# Altium PCB Copy of PCB1.PcbDoc
Units mm, origin at the board's own origin, x right, y up, seen from the top; angles counter-clockwise.
Board outline 152.4 x 101.6 mm, 2 copper layers (Top Layer, Bottom Layer); 12 components, 9 nets, 96 pads, 0 vias.
Unrouted connection lines stored in the file: 21.
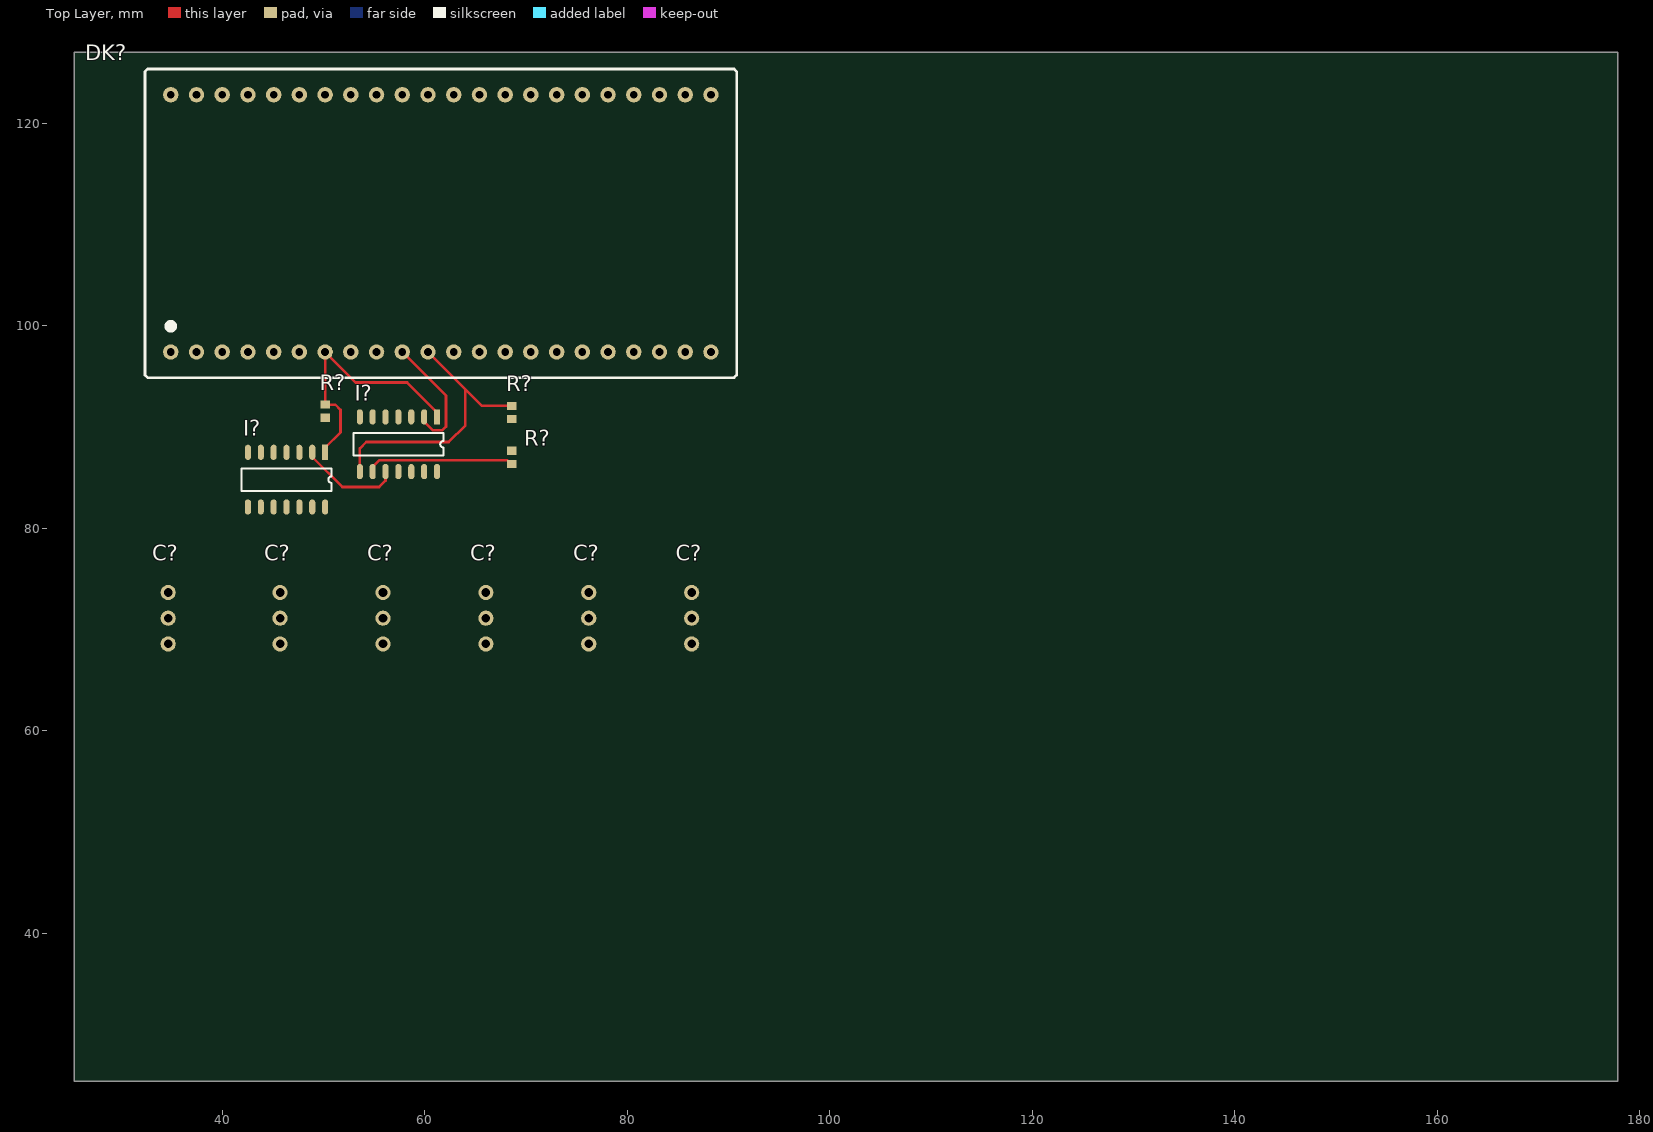
[diagram p0: Top Layer view]
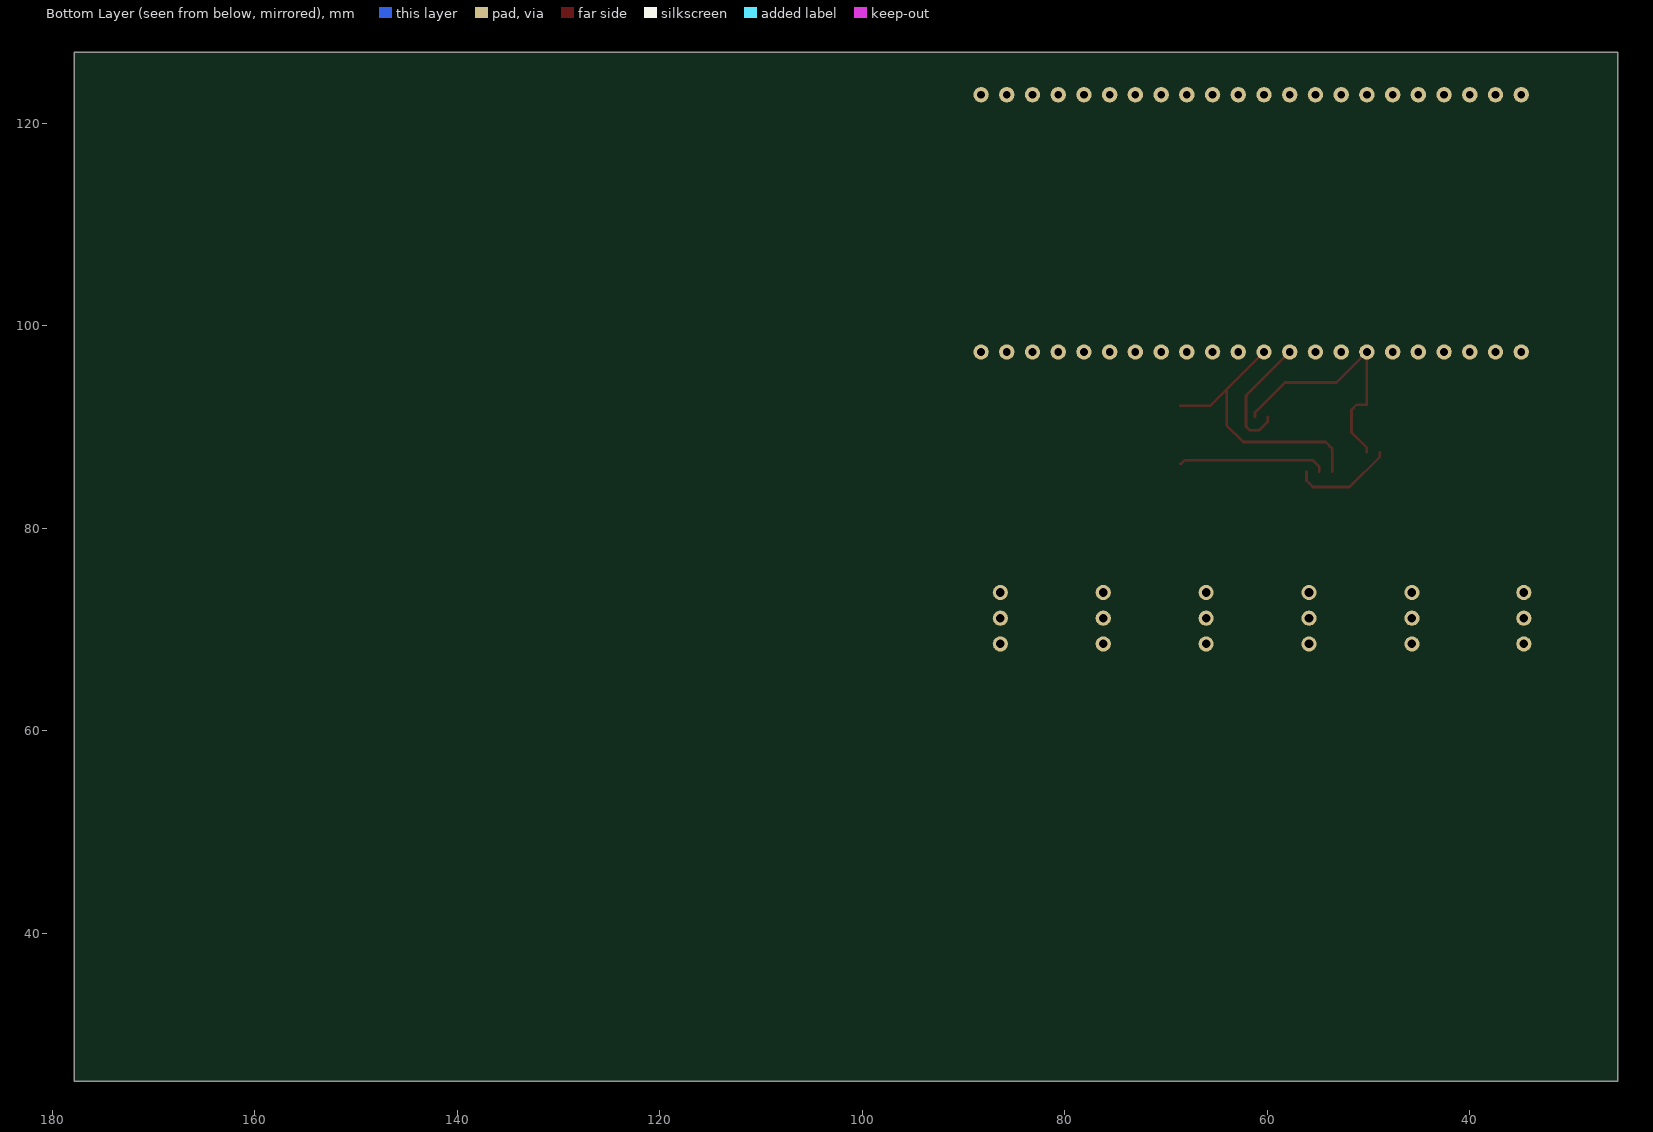
[diagram p1: Bottom Layer view, seen from below]

## Layer stack, top to bottom
Top Solder: solder mask 0.0102, Solder Resist, Dk 3.5
Top Layer: signal copper 0.0356
Dielectric 1: dielectric 0.32, FR-4, Dk 4.8
Bottom Layer: signal copper 0.0356
Bottom Solder: solder mask 0.0102, Solder Resist, Dk 3.5

## Board outline
25.4,25.4 177.8,25.4 177.8,127 25.4,127

## Design rules (kind name [scope] priority, off if disabled: settings)
Clearance Clearance_1 [OnMid vs OnMid] p1: gap=0.254 ignorepadtopadclearanceinfootprint=FALSE sourcerule=37 cellrowname=All cellrowtype=0 cellcolname=All cellcoltype=0 innerlayers=TRUE
Clearance Clearance_2 [(ExistsOnLayer('Top Layer') Or ExistsOnLayer('Bottom Layer')) vs (ExistsOnLayer('Top Layer') Or ExistsOnLayer('Bottom Layer'))] p2: gap=0.254 ignorepadtopadclearanceinfootprint=FALSE sourcerule=37 cellrowname=All cellrowtype=0 cellcolname=All cellcoltype=0 outerlayers=TRUE
Clearance [All] p3: gap=0.254 ignorepadtopadclearanceinfootprint=FALSE ismatrix=TRUE
PolygonConnect [All] p1: connectstyle=Relief reliefconductorwidth=0.254 reliefentries=4 polygonreliefangle="90 Angle" airgapwidth=0.254
RoutingVias [All] p1: holewidth=0.711 width=1.27 viastyle="Through Hole" minholewidth=0.711 minwidth=1.27 maxholewidth=0.711 maxwidth=1.27
SolderMaskExpansion [All] p1: expansion=0.102 istentingtop=FALSE
Width MaxMinWidth_1 [All] p1: maxlimit=1 minlimit=0.102 preferedwidth=0.3 minimp=50.000000 maximp=50.000000 favimp=50.000000
Width [All] p2: maxlimit=0.254 minlimit=0.254 preferedwidth=0.254
30 further rules are at their usual default settings.

## Classes and differential pairs
component class Sheet: C? DK? I? R?

## Components (designator, comment, footprint, x,y, rotation, side; value= is the part's Value field where it differs from the comment)
C? "MOLEX 22-03-5035" PCBComponent_1 55.88,68.58 r90 top
C? "MOLEX 22-03-5035" PCBComponent_1 76.2,68.58 r90 top
C? "MOLEX 22-03-5035" PCBComponent_1 34.671,68.58 r90 top
C? "MOLEX 22-03-5035" PCBComponent_1 45.72,68.58 r90 top
C? "MOLEX 22-03-5035" PCBComponent_1 66.04,68.58 r90 top
C? "MOLEX 22-03-5035" PCBComponent_1 86.36,68.58 r90 top
DK? "ESP32-S3" "ESP32-S3-DevKit footprint" 60.325,110.109 r90 top
I? "74LVC14AD" SOP14 50.165,87.503 r270 top
I? "74LVC125A" SOP14 61.214,90.998 r270 top
R? "10k" RESC1609X50X30NL8T20 68.58,91.44 r270 top
R? "10k" RESC1609X50X30NL8T20 50.165,91.567 r270 top
R? "10k" RESC1609X50X30NL8T20 68.58,87.01 r270 top

## Footprints (in the part's own frame and the unit in brackets; to place one, negate y for a bottom-side part, rotate by r counter-clockwise, add the part's x,y. Pads: shape width x height; smd on the part's side, far side on the other; paste and mask are expansions set on the pad)
"ESP32-S3-DevKit footprint" [mil]
  round 60 hole 30: 1(-500,1000) 2(-500,900) 3(-500,800) 4(-500,700) 5(-500,600) 6(-500,500) 7(-500,400) 8(-500,300) 9(-500,200) 10(-500,100) 11(-500,0) 12(-500,-100) 13(-500,-200) 14(-500,-300) 15(-500,-400) 16(-500,-500) 17(-500,-600) 18(-500,-700) 19(-500,-800) 20(-500,-900) 21(-500,-1000) 22(-500,-1100) 23(500,-1100) 24(500,-1000) 25(500,-900) 26(500,-800) 27(500,-700) 28(500,-600) 29(500,-500) 30(500,-400) 31(500,-300) 32(500,-200) 33(500,-100) 34(500,0) 35(500,100) 36(500,200) 37(500,300) 38(500,400) 39(500,500) 40(500,600) 41(500,700) 42(500,800) 43(500,900) 44(500,1000)
  silkscreen extent -600,-1200 600,1100, body extent -500,-1400 500,1342, height 361
PCBComponent_1 [mm]
  round 1.5 hole 0.85: 1(0,0) 2(2.54,0) 3(5.08,0)
  body extent -2.45,-3.1 7.45,1.8, height 5.8
RESC1609X50X30NL8T20 [mm] "Chip Resistor, 2-Leads, Body 1.65x0.95mm, IPC Medium Density"
  rect 0.8x0.95 smd: 1(-0.65,0) 2(0.65,0)
  body extent -0.82,-0.48 0.82,0.48, height 0.5
SOP14 [mm]
  rect 1.5x0.6 smd: 1(0,0)
  oval 1.5x0.6 smd: 2(0,-1.27) 3(0,-2.54) 4(0,-3.81) 5(0,-5.08) 6(0,-6.35) 7(0,-7.62) 8(5.4,0) 9(5.4,-1.27) 10(5.4,-2.54) 11(5.4,-3.81) 12(5.4,-5.08) 13(5.4,-6.35) 14(5.4,-7.62)
  silkscreen extent 1.58,-8.25 3.82,0.64, body extent -0.36,-8.13 5.69,0.51, height 1.64

## Part data
DK?: library part "ESP32-S3-N16R2 DevKit"
R? R? R?: library part CMP-1666-00005-4, "Chip Resistor, 10 KOhm, +/- 1%, 100 mW, -55 to 155 degC, 0603 (1608 Metric), RoHS, Tape and Reel", Manufacturer="Vishay Semiconductor", Max Operating Temperature="155 degC", Min Operating Temperature="-55 degC", Package Quantity=5000, Voltage Rating="75 V", ComponentLink1Description="Manufacturer URL", ComponentLink1URL=http://www.vishay.com/, ComponentLink2Description=Datasheet, ComponentLink2URL=https://datasheet.ciiva.com/11809/0900766b80d98afc-11809037.pdf, DatasheetVersion=06/2012, Height="0.45 mm", Length="1.55 mm", Mounting Technology="Surface Mount", PackageDescription="2-Pin Surface Mount Device, Body 1.575 x 0.85 mm", PackageReference=0603, Packaging="Tape and Reel", REACH SVHC=Unknown, RoHSCompliant=true

## Nets (pads, with @x,y where several pads share a name; then routed paths per layer and width w, separated by ;. In a path a pad name is that pad's centre, name@x,y a point inside that pad or via, vN(x,y) a via of type N, cw(c..) or ccw(c..) an arc to the next point about the centre after c; other vN are vias at no path point)
3V3: I?.8
+3V3: R?.1@68.58,87.66 R?.2@68.58,90.79
+12: C?.2
GND: C?.1@34.671,68.58 C?.1@45.72,68.58 C?.1@55.88,68.58 C?.1@76.2,68.58 C?.1@86.36,68.58 I?.7 R?.2@50.165,90.917
RX: DK?.11 I?.14@53.594,85.598 R?.1@68.58,92.09 | length 27.7
  Top Layer w0.254: I?.14@53.594,85.598 53.594,87.884 54.229,88.519 62.357,88.519 64.008,90.17 64.008,93.726 ; DK?.11 64.008,93.726 ; R?.1@68.58,92.09 65.644,92.09 64.008,93.726
RXEN: I?.2@48.895,87.503 I?.12@56.134,85.598 | length 10.1
  Top Layer w0.254: I?.2@48.895,87.503 48.895,87.053 51.874,84.074 55.499,84.074 56.126,84.701 56.126,85.59 I?.12@56.134,85.598
SERVO_DATA: C?.3 I?.3@58.674,90.998 I?.13@54.864,85.598 R?.2@68.58,86.36 | length 14.6
  Top Layer w0.254: I?.13@54.864,85.598 54.864,86.048 55.545,86.729 68.136,86.729 68.505,86.36 R?.2@68.58,86.36
TX: DK?.10 I?.2@59.944,90.998 | length 12.3
  Top Layer w0.254: DK?.10 62.103,93.091 62.103,90.043 61.722,89.662 60.83,89.662 59.944,90.548 I?.2@59.944,90.998
TXEN: DK?.7 I?.1 R?.1@50.165,92.217 | length 25.7
  Top Layer w0.254: I?.1@50.165,87.503 50.165,87.953 51.689,89.477 51.689,91.694 51.166,92.217 50.165,92.217 DK?.7 53.181,94.393 58.269,94.393 61.214,91.448 I?.1@61.214,90.998
pads on no net: C?.1@66.04,68.58 DK?.1 DK?.2 DK?.3 DK?.4 DK?.5 DK?.6 DK?.8 DK?.9 DK?.12 DK?.13 DK?.14 DK?.15 DK?.16 DK?.17 DK?.18 DK?.19 DK?.20 DK?.21 DK?.22 DK?.23 DK?.24 DK?.25 DK?.26 DK?.27 DK?.28 DK?.29 DK?.30 DK?.31 DK?.32 DK?.33 DK?.34 DK?.35 DK?.36 DK?.37 DK?.38 DK?.39 DK?.40 DK?.41 DK?.42 DK?.43 DK?.44 I?.3@47.625,87.503 I?.4 I?.5 I?.6 I?.9 I?.10 I?.11 I?.12@45.085,82.103 I?.13@43.815,82.103 I?.14@42.545,82.103